# EAGLE board ir_remote (EAGLE 7.2.0)

Size 93.65 x 95.24 mm. Coordinates in mm from the lower left corner, seen from the top.
Outline: 0,0 93.65,0 93.65,95.24 0,95.24 0,0
Copper layers (1*16): Top 0.035mm / dielectric 1.5mm / Bottom 0.035mm
Design rules "default": minimum track width 10mil, minimum drill 24mil, track to track 8mil, track to pad 8mil, pad to pad 8mil, via to via 8mil, smd to smd 8mil, copper to edge 40mil, drill to drill 8mil, minimum pad ring 10mil, minimum via ring 8mil, stop-mask expansion 4mil, vias tented up to drill 0mil, thermal gap 10mil

## Footprints (pad centres in the part's own frame; a part is rotated, then mirrored left to right if it is on the bottom)
DIL40 = drill 0.813 long: 1 -24.13,-7.62; 2 -21.59,-7.62; 3 -19.05,-7.62; 4 -16.51,-7.62; 5 -13.97,-7.62; 6 -11.43,-7.62; 7 -8.89,-7.62; 8 -6.35,-7.62; 9 -3.81,-7.62; 10 -1.27,-7.62; 11 1.27,-7.62; 12 3.81,-7.62; 13 6.35,-7.62; 14 8.89,-7.62; 15 11.43,-7.62; 16 13.97,-7.62; 17 16.51,-7.62; 18 19.05,-7.62; 19 21.59,-7.62; 20 24.13,-7.62; 21 24.13,7.62; 22 21.59,7.62; 23 19.05,7.62; 24 16.51,7.62; 25 13.97,7.62; 26 11.43,7.62; 27 8.89,7.62; 28 6.35,7.62; 29 3.81,7.62; 30 1.27,7.62; 31 -1.27,7.62; 32 -3.81,7.62; 33 -6.35,7.62; 34 -8.89,7.62; 35 -11.43,7.62; 36 -13.97,7.62; 37 -16.51,7.62; 38 -19.05,7.62; 39 -21.59,7.62; 40 -24.13,7.62
LED5MM = drill 0.813 octagon: A -1.27,0; K 1.27,0
0207/12 = drill 0.813 octagon: 1 -6.35,0; 2 6.35,0
B3F-10XX = drill 1.016 long: 1 -3.251,2.261; 2 3.251,2.261; 3 -3.251,-2.261; 4 3.251,-2.261
BLOSSOM-BLM-18650-2PCS = drill 3: 1 -72,0; 2 0,0; 3 -72,20; 4 0,20 | hole 3.5: -64,0; -8,0; -64,20; -8,20

## Placement (x,y rotation side)
IC1  PIC18F4X2DIL40  [DIL40]  45.72,55.88 0 top
LED1  [LED5MM]  45.72,90.17 0 top
R1  1k  [0207/12]  22.86,77.47 90 top
S1  [B3F-10XX]  39.37,81.28 0 top
S2  [B3F-10XX]  52.07,81.28 0 top
S3  [B3F-10XX]  33.02,71.12 0 top
S4  [B3F-10XX]  45.72,71.12 0 top
S5  [B3F-10XX]  58.42,71.12 0 top
U$1  BLOSSOM-BLM-18650-2PCS  [BLOSSOM-BLM-18650-2PCS]  82.55,13.97 0 top

## Library data of the parts
IC1 = pic18f4x2
LED1 = led
R1 = resistor
S1-S5 = switch-omron; MPN: B3F-1000; OC_FARNELL: 176432; OC_NEWARK: 36M3542
U$1 = battery-holders

## Nets
+3V3: IC1.11 IC1.32 S1.3 S2.3 S3.3 S4.3 S5.3 U$1.1
GND: IC1.12 IC1.31 LED1.K
IN1: IC1.33 S1.1
IN2: IC1.34 S2.1
IN3: IC1.35 S3.1
IN4: IC1.36 S4.1
IN5: IC1.37 S5.1
MCLR/(ICSP_VPP): IC1.1
N$1: LED1.A R1.2
N$7: U$1.3
OSC1/CLKI: IC1.13
OSC2/CLKO/RA6: IC1.14
OUT: IC1.2 R1.1

## Tracks (layer width: path | path; a pad name or v marks a point on that pad's centre or on a via)
+3V3  (7 unrouted)
GND  (2 unrouted)
IN1  (1 unrouted)
IN2  (1 unrouted)
IN3  (1 unrouted)
IN4  (1 unrouted)
IN5  (1 unrouted)
N$1  (1 unrouted)
OUT  (1 unrouted)